# Altium PCB 幻彩灯带立创.PcbDoc
Units mm, origin at the board's own origin, x right, y up, seen from the top; angles counter-clockwise.
Board outline 96.28 x 79 mm, 2 copper layers (Top Layer, Bottom Layer); 38 components, 40 nets, 162 pads, 114 vias.
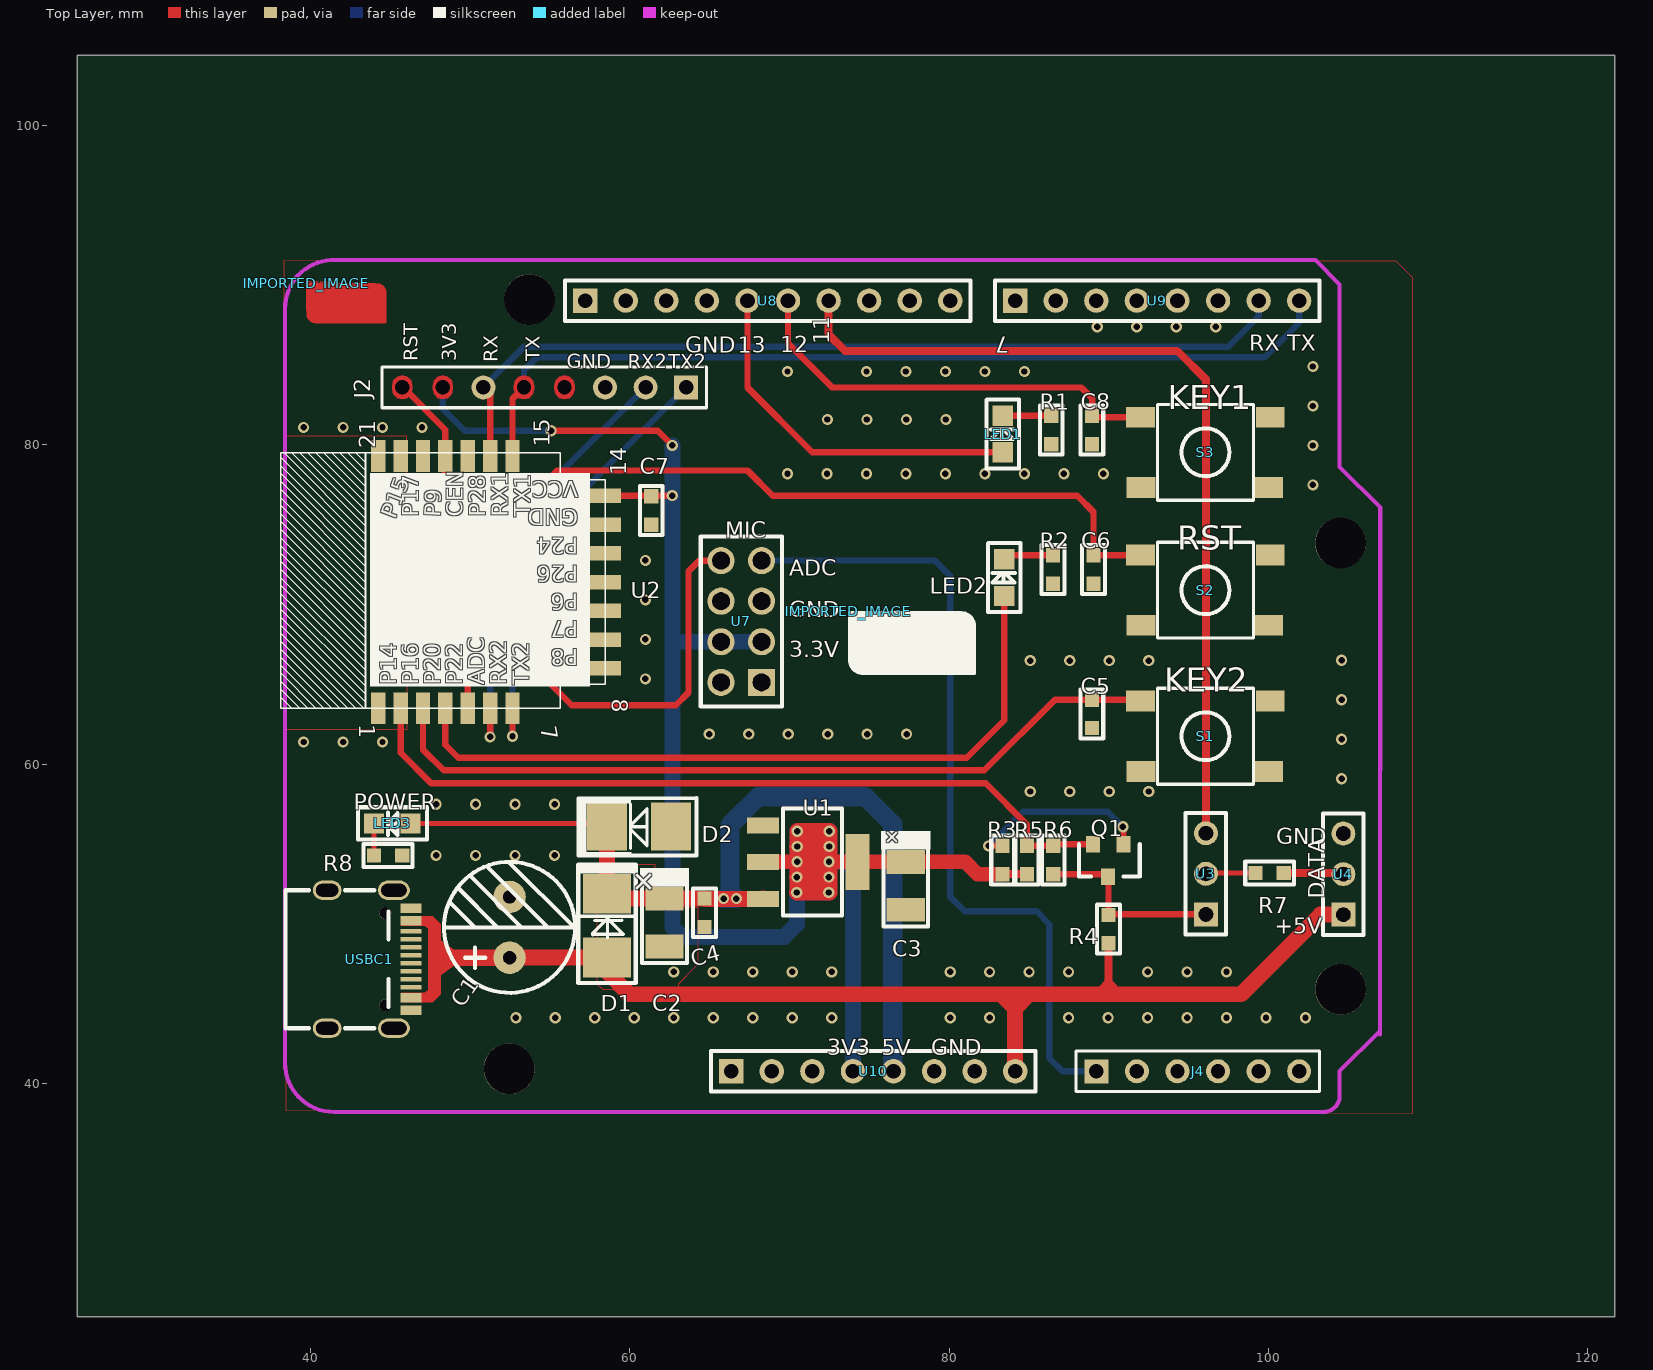
[diagram p0: Top Layer view]
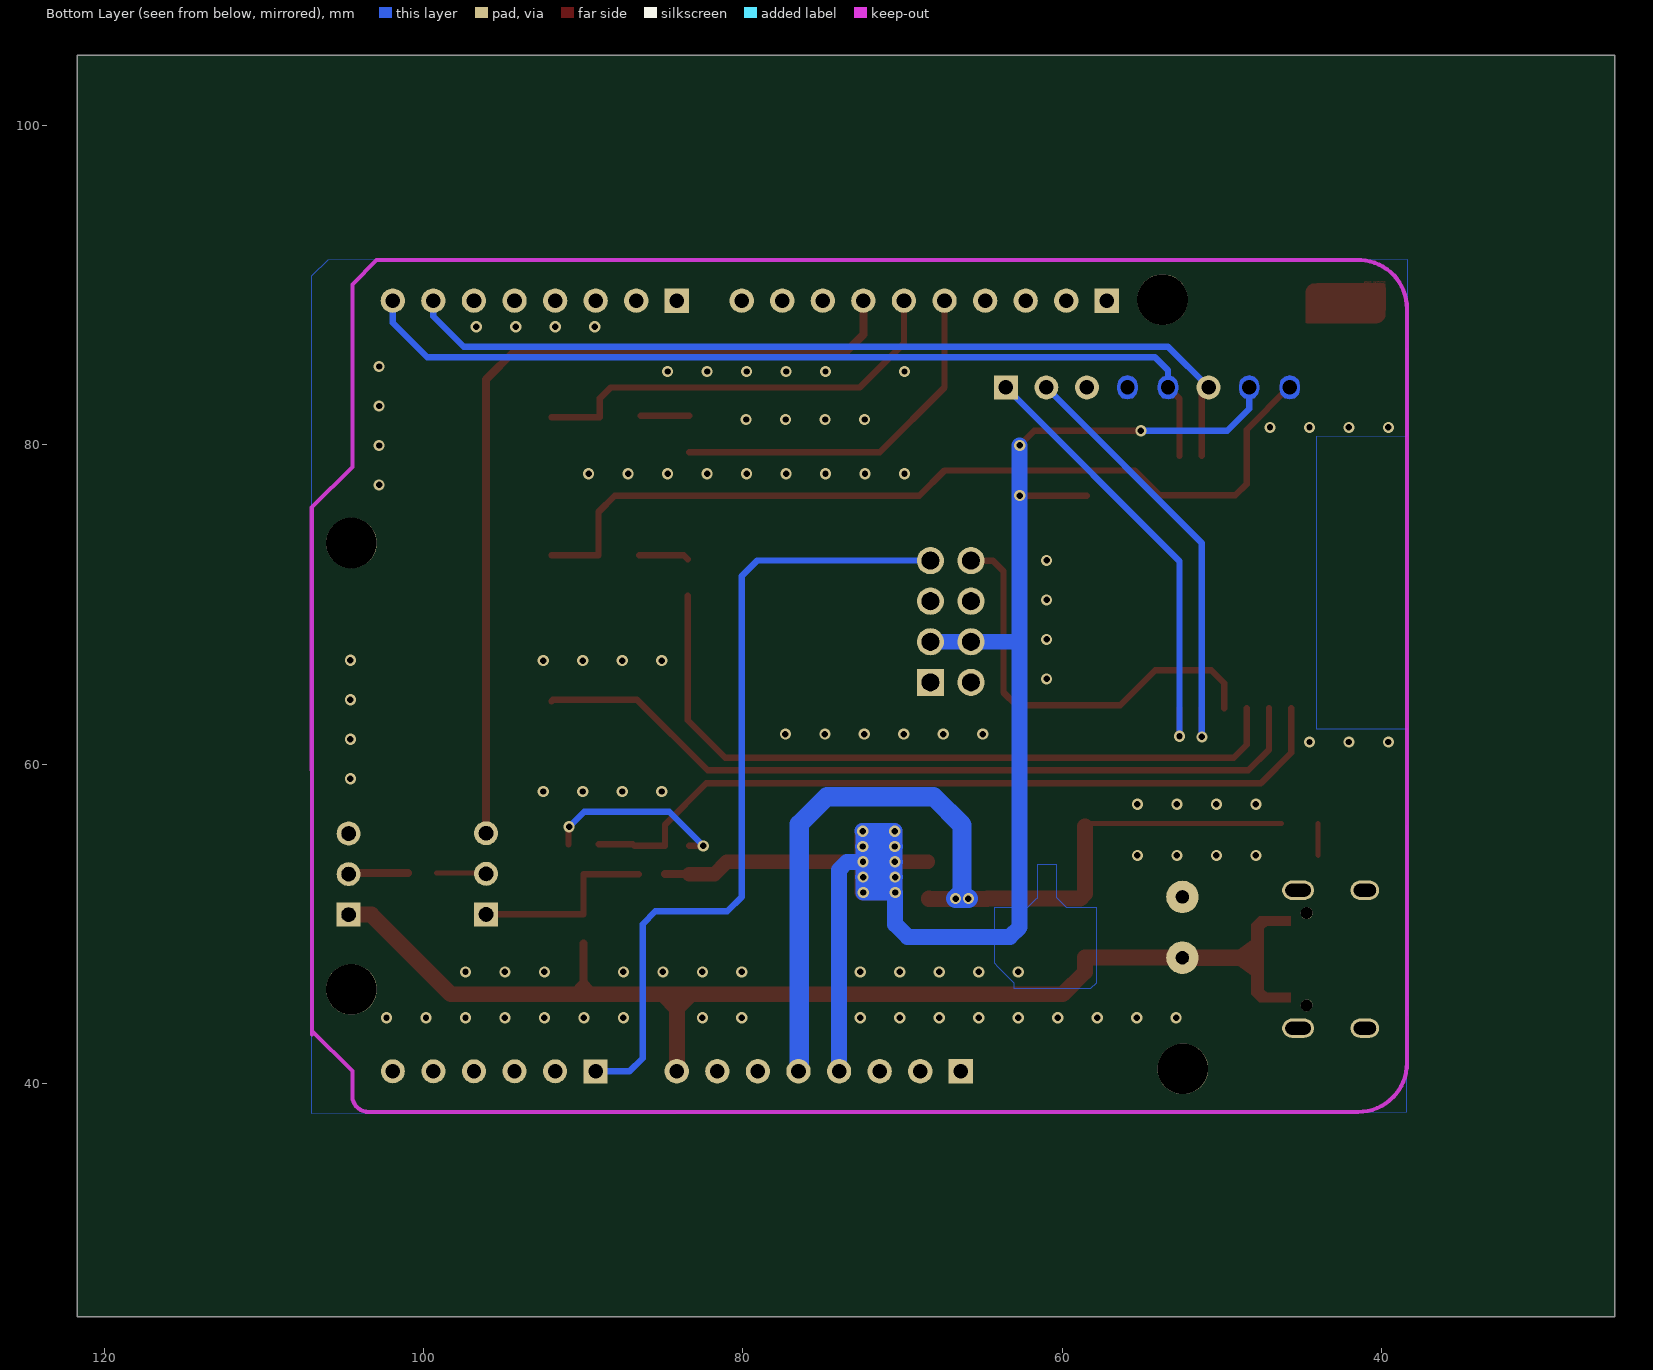
[diagram p1: Bottom Layer view, seen from below]

## Layer stack, top to bottom
Top Layer: signal copper (thickness not stored)
Dielectric: dielectric 0.32, FR-4, Dk 4.8
Bottom Layer: signal copper (thickness not stored)

## Board outline
121.682,25.4 25.4,25.4 25.4,104.397 121.682,104.397

## Components (designator, comment, footprint, x,y, rotation, side; value= is the part's Value field where it differs from the comment)
C1 "220uF±20%/16V" CD0.15 52.477,49.787 r90 top
C2 "22uF±20%/16V" _____B3528 62.177,50.087 r270 top
C3 "22uF±20%/16V" _____B3528 77.277,52.387 r270 top
C4 "0.1uF±20%/50V" C0603 64.677,51.587 r270 top
C5 "0.1uF±20%/16V" C0603 88.936,62.258 r90 top
C6 "0.1uF±20%/16V" C0603 89.038,73.079 r270 top
C7 "0.1uF±20%/16V" C0603 61.352,74.999 r90 top
C8 "0.1uF±20%/16V" C0603 88.936,80.038 r90 top
D1 "SS210" SMA(DO-214AC) 58.577,49.887 r90 top
D2 "SMBJ05CA" SMB(DO-214AA) 60.577,56.087 r180 top
IMPORTED_IMAGE "IMPORTED_IMAGE" IMPORTED_IMAGE#1 73.677,69.583 r0 top
IMPORTED_IMAGE "IMPORTED_IMAGE" IMPORTED_IMAGE#2 39.758,90.109 r0 top
J2 "CON8" HDR1X8Z 63.536,83.594 r180 top
J4 "CON6" HDR1X6Z 89.216,40.77 r0 top
LED1 "LED" LED0805_1 83.348,79.53 r90 top
LED2 "LED" LED0805_1 83.45,70.539 r90 top
LED3 "LED" LED0805_1 46.277,56.287 r180 top
Q1 "S8050" SOT-23-NPN 90.918,54.987 r180 top
R1 "1K±5%" R0603 86.396,80.038 r90 top
R2 "1K±5%" R0603 86.498,73.079 r270 top
R3 "2K±5%" R0603 83.348,53.114 r90 top
R4 "2K±5%" R0603 89.977,48.787 r90 top
R5 "2K±5%" R0603 84.872,53.114 r90 top
R6 "NC/0R" R0603 86.523,54.892 r270 top
R7 "1R±5%" R0603 99.177,53.187 r0 top
R8 "1R±5%" R0603 43.977,54.287 r0 top
S1 "KEY_SW2" KEY4-SMD 96.048,61.75 r0 top
S2 "KEY_SW2" KEY4-SMD 96.048,70.894 r0 top
S3 "KEY_SW2" KEY4-SMD 96.048,79.53 r0 top
U1 "GM1117-3.3ST3T" SOT-223 71.302,53.868 r270 top
U2 "WIFI_BLE_CBU" WIFI_BLE_CBU 58.456,71.402 r90 top
U3 "OUT_RGB_CBU" "2.54 3P" 96.076,53.137 r90 top
U4 "OUT_RGB_CBU" "2.54 3P" 104.684,53.114 r90 top
U7 "DIP-2X4P-2.54" DIP-2X4P-2.54 66.986,68.937 r90 top
U8 "2.54_1X10P" 2.54_1X10P 57.212,89.03 r0 top
U9 "2.54_1X8P" 2.54_1X8P 84.136,89.03 r0 top
U10 "2.54_1X8P" 2.54_1X8P 66.356,40.77 r0 top
USBC1 "TYPE-C-31-M-12" USB-C_SMD-TYPE-C-31-M-12 43.677,47.787 r270 top

## Footprints (in the part's own frame and the unit in brackets; to place one, negate y for a bottom-side part, rotate by r counter-clockwise, add the part's x,y. Pads: shape width x height; smd on the part's side, far side on the other; paste and mask are expansions set on the pad)
"2.54 3P" [mm]
  rect 1.5x1.5 hole 0.9 slot 0.905 at 0 deg: 1(-2.539,0)
  round 1.5 hole 0.9 slot 0.905 at 0 deg: 2(0,0) 3(2.54,0)
  silkscreen extent -3.81,-1.27 3.81,1.27
2.54_1X8P [mil]
  rect 60x60 hole 36: 1(0,0)
  round 60 hole 36: 2(100,0) 3(200,0) 4(300,0) 5(400,0) 6(500,0) 7(600,0) 8(700,0)
  silkscreen extent -50,-50 750,50
2.54_1X10P [mil]
  rect 60x60 hole 36: 1(0,0)
  round 60 hole 36: 2(100,0) 3(200,0) 4(300,0) 5(400,0) 6(500,0) 7(600,0) 8(700,0) 9(800,0) 10(900,0)
  silkscreen extent -50,-50 950,50
_____B3528 [mm]
  rect 1.5x2.4 smd: 1(-1.5,0) 2(1.5,0)
  silkscreen extent -3.4,-1.52 2.54,1.52
C0603 [mil]
  rect 35x35 smd: 1(0,0) 2(70,0)
  silkscreen extent -25,-28 95,28
CD0.15 [mil]
  round 80 hole 32 slot 32.2 at 0 deg: 1(-75,0) 2(75,0)
  silkscreen extent -161,-161 161,161
DIP-2X4P-2.54 [mm]
  rect 1.7x1.7 hole 1.1 slot 1.105 at 0 deg: 1(-3.81,-1.27)
  round 1.7 hole 1.1 slot 1.105 at 0 deg: 2(-3.81,1.27) 3(-1.27,-1.27) 4(-1.27,1.27) 5(1.27,-1.27) 6(1.27,1.27) 7(3.81,-1.27) 8(3.81,1.27)
  silkscreen extent -5.33,-2.54 5.33,2.54
HDR1X6Z [mm]
  rect 1.5x1.5 hole 0.9: 1(0,0)
  round 1.5 hole 0.9: 2(2.54,0) 3(5.08,0) 4(7.62,0) 5(10.16,0) 6(12.7,0)
  silkscreen extent -1.27,-1.27 13.97,1.27
HDR1X8Z [mm]
  rect 1.5x1.5 hole 0.9: 1(0,0)
  round 1.5 hole 0.9: 2(2.54,0) 3(5.08,0) 6(12.7,0)
  round 0 hole 0.9: 4(7.62,0) 5(10.16,0) 7(15.24,0) 8(17.78,0)
  Top Layer region: 8.255,-0.115 8.17,-0.433 7.937,-0.665 7.62,-0.75 7.302,-0.665 7.07,-0.433 6.985,-0.115 6.985,0.115 7.07,0.432 7.302,0.665 7.62,0.75 7.937,0.665 8.17,0.432 8.255,0.115
  Top Layer region: 10.795,-0.115 10.71,-0.433 10.477,-0.665 10.16,-0.75 9.842,-0.665 9.61,-0.433 9.525,-0.115 9.525,0.115 9.61,0.432 9.842,0.665 10.16,0.75 10.477,0.665 10.71,0.432 10.795,0.115
  Top Layer region: 15.875,-0.115 15.79,-0.433 15.557,-0.665 15.24,-0.75 14.922,-0.665 14.69,-0.433 14.605,-0.115 14.605,0.115 14.69,0.432 14.922,0.665 15.24,0.75 15.557,0.665 15.79,0.432 15.875,0.115
  Top Layer region: 18.415,-0.115 18.33,-0.433 18.097,-0.665 17.78,-0.75 17.462,-0.665 17.23,-0.433 17.145,-0.115 17.145,0.115 17.23,0.432 17.462,0.665 17.78,0.75 18.097,0.665 18.33,0.432 18.415,0.115
  Bottom Layer region: 8.255,-0.115 8.17,-0.433 7.937,-0.665 7.62,-0.75 7.302,-0.665 7.07,-0.433 6.985,-0.115 6.985,0.115 7.07,0.432 7.302,0.665 7.62,0.75 7.937,0.665 8.17,0.432 8.255,0.115
  Bottom Layer region: 10.795,-0.115 10.71,-0.433 10.477,-0.665 10.16,-0.75 9.842,-0.665 9.61,-0.433 9.525,-0.115 9.525,0.115 9.61,0.432 9.842,0.665 10.16,0.75 10.477,0.665 10.71,0.432 10.795,0.115
  Bottom Layer region: 15.875,-0.115 15.79,-0.433 15.557,-0.665 15.24,-0.75 14.922,-0.665 14.69,-0.433 14.605,-0.115 14.605,0.115 14.69,0.432 14.922,0.665 15.24,0.75 15.557,0.665 15.79,0.432 15.875,0.115
  Bottom Layer region: 18.415,-0.115 18.33,-0.433 18.097,-0.665 17.78,-0.75 17.462,-0.665 17.23,-0.433 17.145,-0.115 17.145,0.115 17.23,0.432 17.462,0.665 17.78,0.75 18.097,0.665 18.33,0.432 18.415,0.115
  silkscreen extent -1.27,-1.27 19.05,1.27
IMPORTED_IMAGE#1 [mm]
  silkscreen extent 0,-3.99 8,0
IMPORTED_IMAGE#2 [mm]
  Top Layer region: 166 vertices and 6 holes, not listed, extent 0,-2.494 5,0
KEY4-SMD [mm]
  rect 1.8x1.3 smd: 1(-4.035,-2.2) 2(-4.065,2.2) 3(4.065,2.2) 4(3.965,-2.2)
  silkscreen extent -3,-3 3,3
LED0805_1 [mil]
  rect 50x50 smd: 1(0,0) 2(90,0)
  silkscreen extent -40,-40 130,40
R0603 [mil]
  rect 35x35 smd: 1(0,0) 2(70,0)
  silkscreen extent -25,-28 95,28
SMA(DO-214AC) [mm]
  rect 2.5x3 smd: 1(-2,0) 2(2,0)
  silkscreen extent -3.6,-1.84 3.94,1.83
SMB(DO-214AA) [mm]
  rect 2.5x3 smd: 1(-2,0) 2(2,0)
  silkscreen extent -3.6,-1.8 3.91,1.82
SOT-23-NPN [mil]
  rect 35x40 smd: 1(75,0.01) 2(0,0.01) 3(38,80.01)
  silkscreen extent -40,0 110,80
SOT-223 [mm]
  rect 1x2 smd: 1(-2.3,-2.95) 2(0,-2.95) 3(2.3,-2.95)
  rect 3.5x1.5 smd: 2(0,2.95)
  silkscreen extent -3.35,-1.71 3.35,1.99
USB-C_SMD-TYPE-C-31-M-12 [mm]
  oval 1.2x2 hole 0.8 slot 1.6 at 90 deg: 0(-4.32,1.556) 0(4.32,1.556)
  oval 1.2x1.8 hole 0.8 slot 1.4 at 90 deg: 0(-4.32,-2.624) 0(4.32,-2.624)
  rect 0.3x1.3 smd: A1(-3.35,2.623) A4(-2.55,2.623) A5(-1.25,2.623) A6(-0.25,2.623) A7(0.25,2.623) A8(1.25,2.624) A9(2.55,2.623) A12(3.35,2.623) B1(3.05,2.623) B4(2.25,2.623) B5(1.75,2.623) B6(0.75,2.623) B7(-0.75,2.623) B8(-1.75,2.624) B9(-2.25,2.623) B12(-3.05,2.623)
  round 0.75 hole 0.75 unplated: ""(-2.89,1.026) ""(2.89,1.026)
  silkscreen extent -4.32,-5.23 4.32,1.22
WIFI_BLE_CBU [mm]
  rect 2x0.9 smd: 1(-7.9,14.2) 2(-7.9,12.8) 3(-7.9,11.4) 4(-7.9,10) 5(-7.9,8.6) 6(-7.9,7.2) 7(-7.9,5.8) 15(7.9,5.8) 16(7.9,7.2) 17(7.9,8.6) 18(7.9,10) 19(7.9,11.4) 20(7.9,12.8) 21(7.9,14.2)
  rect 0.9x2 smd: 8(-5.4,0) 9(-3.6,0) 10(-1.8,0) 11(0,0) 12(1.8,0) 13(3.6,0) 14(5.4,0)
  silkscreen extent -7.9,0 8.14,20.33

## Free pads (board coordinates)
  round 3.175 hole 3.175 unplated: ""(52.447,40.927) ""(53.717,89.087) ""(104.517,45.907) ""(104.517,73.847)

## Via types
v1: diameter 0.7, hole 0.4, Top Layer to Bottom Layer, 114 vias

## Nets (pads, with @x,y where several pads share a name; then routed paths per layer and width w, separated by ;. In a path a pad name is that pad's centre, name@x,y a point inside that pad or via, vN(x,y) a via of type N, cw(c..) or ccw(c..) an arc to the next point about the centre after c; other vN are vias at no path point)
+3.3V: C3.1 C7.2 J2.7 R3.1 R5.1 U1.2 U2.14 U7.3 U7.4 | length 138.8
  Top Layer w0.4: v1(55.078,80.876) 61.752,80.876 v1(62.666,79.963) ; U2.14 v1@62.666,76.802 ; U1.2@68.404,53.898 U1.2@68.394,53.887 ; 71.171,53.887 71.19,53.868 U1.2@74.252,53.868 ; v1@72.496,53.868 72.445,53.868 72.425,53.887 70.494,53.887 70.477,53.887 U1.2@68.394,53.887 ; U1.2@68.394,53.887 68.363,53.856 68.352,53.868 68.371,53.887 U1.2@68.394,53.887
  Top Layer w0.5: R3.1 R5.1
  Top Layer w0.9: U1.2@68.404,53.898 v1@70.494,53.898 ; v1(72.479,53.887) 81,53.887 81.774,53.114 R3.1
  Top Layer w1: v1(70.46,51.968) v1@70.494,51.968 ; v1(70.468,52.928) v1@70.494,52.928 ; v1@70.477,53.887 v1@72.453,53.887 ; v1(70.485,54.847) v1@70.494,54.847 ; v1@72.425,53.887 v1@72.479,53.887 ; v1(72.462,51.968) v1@70.494,51.968 ; v1(72.47,52.928) v1@70.494,52.928 ; v1(72.487,54.847) v1@70.494,54.847 ; v1@72.496,51.968 72.496,53.868 72.496,53.898 v1(72.496,55.807) v1(70.494,55.807) v1@70.494,54.847 ; v1@70.494,51.968 v1@70.494,52.928 ; v1@70.494,52.928 70.494,53.887 70.494,53.898 v1@70.494,54.847
  Bottom Layer w0.4: J2.7 48.296,82.248 49.668,80.876 v1(55.078,80.876)
  Bottom Layer w1: 62.665,67.677 U7.3 ; v1(62.666,79.963) v1(62.666,76.817) 62.665,49.799 63.277,49.187 69.678,49.187 70.46,49.97 v1(70.46,51.968) ; v1(70.46,51.968) v1(72.462,51.968) v1@72.462,55.773 ; v1(70.468,52.928) v1(72.47,52.928) ; v1@70.477,53.887 v1@72.479,53.887 ; v1(70.485,54.847) v1(72.487,54.847) ; v1@70.494,52.002 v1(70.494,55.807) v1(72.496,55.807) ; v1(72.479,53.887) 73.478,53.887 73.976,53.389 73.976,40.77
  other v1: 70.477,53.887
+3V3: U10.4
+5V: C1.1 D1.1 R4.1 U4.1 USBC1.A4 USBC1.A9 USBC1.B4 USBC1.B9 | length 83.7
  Top Layer w0.254: USBC1.A9 47.227,45.237 47.578,45.588 47.578,49.987 47.227,50.337 USBC1.A4
  Top Layer w0.5: 89.521,45.875 89.952,46.307 ; 89.8,45.596 89.952,45.748 89.952,46.307 ; R4.1 89.977,46.383 89.952,46.358 ; 90.714,45.596 89.952,46.358 ; 89.952,46.307 89.952,46.358
  Top Layer w1: C1.1@52.487,47.882 47.877,47.887 D1.1 58.577,46.987 59.968,45.596 83.272,45.596 84.136,44.732 ; 83.177,45.587 89.8,45.596 90.714,45.596 98.284,45.596 103.262,50.574 U4.1@104.684,50.574 ; 84.136,40.77 84.136,44.732 ; 84.999,45.596 84.136,44.732
+5VF: C2.1 C4.1 D1.2 D2.2 LED3.1 U1.3 U10.5 | length 59.2
  Top Layer w0.3: LED3.1 58.377,56.287 D2.2
  Top Layer w1: D2.2 D1.2 58.877,51.587 C4.1 64.696,51.568 U1.3 ; U1.3 U1.3@68.353,51.587
  Bottom Layer w1.2: v1@65.876,51.587 66.676,51.588 66.277,51.988 66.277,56.188 68.055,57.966 74.738,57.966 76.465,56.238 76.465,40.821 U10.5
  other v1: 65.877,51.587 66.677,51.587
ADC: U2.5 U7.8 | length 26.9
  Top Layer w0.4: U2.5@49.856,63.502 49.856,65.067 50.676,65.887 54.177,65.887 56.376,63.687 62.879,63.687 63.676,64.487 63.676,72.088 64.336,72.747 U7.8
GND: C1.2 C2.2 C3.2 C4.2 C5.1 C6.2 C7.1 C8.1 D2.1 J2.3 J2.4 R1.1 R2.2 R8.2 S1.1 S2.1 S3.1 U1.1 U2.13 U4.3 U7.5 U7.6 U8.4 U10.6 U10.7 USBC1.0 USBC1.A1 USBC1.A12 USBC1.B1 USBC1.B12
  other v1: 52.868,44.123 55.341,44.123 57.813,44.123 60.285,44.123 62.757,44.123 65.23,44.123 67.702,44.123 70.174,44.123 72.647,44.123 80.063,44.123 82.536,44.123 87.48,44.123 89.952,44.123 92.425,44.123 94.897,44.123 97.369,44.123 99.841,44.123 102.314,44.123 62.757,46.993 65.23,46.993 67.702,46.993 70.174,46.993 72.647,46.993 80.063,46.993 82.536,46.993 85.008,46.993 87.48,46.993 92.425,46.993 94.897,46.993 94.897,46.993 97.369,46.993 47.877,54.287 50.349,54.287 52.821,54.287 55.294,54.287 47.877,57.487 50.349,57.487 52.821,57.487 55.294,57.487 85.077,58.287 87.549,58.287 90.022,58.287 92.494,58.287 104.577,59.087 39.577,61.387 42.049,61.387 44.521,61.387 104.577,61.56 64.977,61.887 67.449,61.887 69.921,61.887 72.394,61.887 74.866,61.887 77.338,61.887 104.577,64.032 60.977,65.343 85.077,66.487 87.549,66.487 90.022,66.487 92.494,66.487 104.577,66.504 60.977,67.815 60.977,70.287 60.977,72.76 102.777,77.487 69.877,78.187 72.349,78.187 74.821,78.187 77.294,78.187 79.766,78.187 82.238,78.187 84.711,78.187 87.183,78.187 89.655,78.187 102.777,79.96 39.577,81.087 42.049,81.087 44.521,81.087 46.994,81.087 72.377,81.587 74.849,81.587 77.321,81.587 79.794,81.587 102.777,82.432 69.877,84.587 74.821,84.587 77.294,84.587 79.766,84.587 82.238,84.587 84.71,84.587 102.777,84.904 89.277,87.387 91.749,87.387 94.221,87.387 96.694,87.387
MIC: J4.1 U7.7 | length 50.9
  Bottom Layer w0.4: U7.7 79.107,72.757 80.077,71.787 80.077,51.687 80.979,50.787 85.477,50.787 86.277,49.987 86.277,41.587 87.095,40.77 J4.1
NETC8_2: C8.2 S3.2 U8.6 | length 27.4
  Top Layer w0.4: U8.6 69.912,86.352 72.678,83.587 88.276,83.587 88.949,82.915 88.949,81.73 S3.2
NETJ1_5: LED1.1 U8.5 | length 23.1
  Top Layer w0.4: U8.5 67.372,83.593 71.433,79.53 LED1.1
NETJ7_2: R7.2 U4.2 | length 3.8
  Top Layer w0.5: R7.2 104.611,53.187 U4.2
NETLED1_2: LED1.2 R1.2 | length 3
  Top Layer w0.4: LED1.2 R1.2
NETLED2_2: LED2.2 R2.1 | length 3.2
  Top Layer w0.4: LED2.2 83.704,73.079 R2.1
NETLED3_2: LED3.2 R8.1 | length 2
  Top Layer w0.3: R8.1 43.991,54.301 LED3.2
NETQ1_2: Q1.2 R3.2 | length 11.7
  Top Layer w0.4: v1(82.477,54.887) 83.344,54.887 R3.2 ; v1(90.877,56.087) 90.918,56.046 Q1.2
  Bottom Layer w0.4: v1(82.477,54.887) 84.615,57.026 89.938,57.026 v1(90.877,56.087)
OUT_DATA: Q1.1 R5.2 R6.1 U2.2 | length 49.4
  Top Layer w0.4: U2.2 45.657,60.708 47.56,58.804 82.282,58.804 84.872,56.213 R5.2 86.783,54.892 86.884,54.994 Q1.1@89.013,54.987
OUT_RGB: R7.1 U3.2 | length 3.2
  Top Layer w0.3: U3.2@96.048,53.114 96.122,53.187 R7.1
OUT_RGB_ARD: U3.3 U8.7 | length 55.3
  Top Layer w0.5: U8.7 72.452,86.913 73.478,85.887 94.278,85.887 96.076,84.088 U3.3
OUT_RGB_CBU: Q1.3 R4.2 R6.2 U3.1 | length 12.1
  Top Layer w0.4: R6.2 89.978,53.114 89.978,50.597 U3.1@96.076,50.597
P6: U2.10
P6_KEY1: C5.2 S1.2 U2.3 | length 49.9
  Top Layer w0.4: U2.3 47.057,60.908 48.347,59.617 82.205,59.617 86.625,64.036 91.898,64.036 S1.2
P7: U2.9
P8: U2.8
P9: U2.19
P14: U2.1
P15: U2.21
P17: U2.20
P22: LED2.1 U2.4 | length 46.4
  Top Layer w0.4: U2.4 48.456,61.208 49.259,60.404 81.093,60.404 83.45,62.76 LED2.1
P24: U2.12
P26: U2.11
P28: U2.17
RST: C6.1 J2.8 S2.2 U2.18 | length 55.5
  Top Layer w0.4: J2.8 45.807,83.594 48.456,80.945 48.456,77.541 49.16,76.838 53.91,76.838 55.459,78.387 67.377,78.387 68.952,76.812 88.022,76.812 89.038,75.796 C6.1 S2.2
RX2: J2.2 U2.6 | length 27.7
  Top Layer w0.4: v1(51.257,61.711) U2.6
  Bottom Layer w0.4: v1@51.256,61.711 51.256,73.854 J2.2
S$975: 
S$977: 
S$979: 
S$983: 
S$992: 
TX2: J2.1 U2.7 | length 28.1
  Top Layer w0.4: v1(52.656,61.75) U2.7
  Bottom Layer w0.4: v1(52.656,61.75) 52.658,72.714 J2.1
WRX: J2.6 U2.16 | length 55.8
  Top Layer w0.4: J2.6 51.256,83.174 U2.16
  Bottom Layer w0.4: J2.6 53.376,86.134 97.471,86.134 99.376,88.039 99.376,89.03
WTX: J2.5 U2.15 | length 56.8
  Top Layer w0.4: U2.15 52.656,82.874 J2.5
  Bottom Layer w0.4: J2.5 53.376,84.668 54.189,85.48 99.763,85.48 101.916,87.633 101.916,89.03
pads on no net: J4.2 J4.3 J4.4 J4.5 J4.6 S1.3 S1.4 S2.3 S2.4 S3.3 S3.4 U7.1 U7.2 U8.1 U8.2 U8.3 U8.8 U8.9 U8.10 U9.1 U9.2 U9.3 U9.4 U9.5 U9.6 U9.7 U9.8 U10.1 U10.2 U10.3 U10.8 USBC1. USBC1.A5 USBC1.A6 USBC1.A7 USBC1.A8 USBC1.B5 USBC1.B6 USBC1.B7 USBC1.B8

## Polygon pours and split planes (outlines as drawn)
GND on Top Layer (solid): 38.477,38.287 38.377,62.187 46.077,62.187 46.038,80.545 38.438,80.545 38.377,91.587 46.041,91.527 107.957,91.527 108.957,90.527 108.982,90.502 108.982,38.111
+3.3V on Top Layer (solid): 60.438,53.698 60.438,51.641 60.006,51.209 59.803,51.006 57.948,51.006 57.948,46.256 58.304,45.901 63.054,45.901 63.054,46.256 64.07,47.272 64.298,47.501 64.298,51.006 62.216,51.006 61.708,51.514 61.606,51.616 61.606,53.698
GND on Bottom Layer (solid): 38.416,38.23 38.377,62.187 44.076,62.177 44.076,80.537 38.406,80.557 38.377,91.587 105.996,91.57 106.996,90.57 107.021,90.544 107.021,38.154
+3.3V on Bottom Layer (solid): 60.374,53.724 60.374,51.666 59.942,51.235 59.739,51.031 57.885,51.031 57.885,46.282 58.241,45.926 62.99,45.926 62.99,46.282 64.006,47.298 64.235,47.526 64.235,51.031 62.152,51.031 61.644,51.539 61.543,51.641 61.543,53.724

## Keep-outs
Keep-Out Layer:
  lines w0.254 net S$975: 38.416,41.287 ccw(c41.469,41.28) 41.466,38.227
  lines w0.254 net S$977: 103.426,38.227 ccw(c103.445,39.238) 104.456,39.208
  lines w0.254 net S$992: 38.416,88.527 cw(c41.447,88.538) 41.584,91.567

## Other copper
Top Layer:
  region net +5V: 45.677,45.087 45.677,45.687 47.177,45.687 47.377,45.887 47.377,49.687 47.177,49.887 45.677,49.887 45.677,50.487 47.677,50.487 48.177,49.987 48.177,48.987 48.977,48.387 52.377,48.387 52.377,47.387 48.977,47.387 48.177,46.787 48.177,45.587 47.677,45.087 45.677,45.087

## Silkscreen, mask and mechanical layers (free items; w line width, h text height)
Top Overlay:
  region: 43.75,78.209 43.75,64.874 57.502,64.874 57.502,78.209
  text "7" at 83.755,86.761 h1 r180
  text "11" at 72.477,86.287 h1 r90
  text "RX" at 98.777,85.887 h1
  text "TX" at 101.177,85.887 h1
  text "12" at 69.437,85.787 h1
  text "GND" at 63.477,85.761 h1
  text "13" at 66.777,85.761 h1
  text "3V3" at 49.147,85.245 h0.89 r90
  text "RST" at 46.734,85.22 h0.89 r90
  text "TX" at 54.38,85.22 h0.89 r90
  text "RX" at 51.738,85.169 h0.89 r90
  text "GND" at 56.069,84.801 h0.89
  text "RX2" at 59.879,84.801 h0.89
  text "TX2" at 62.419,84.801 h0.89
  text "KEY1" at 93.677,82.237 h1.5
  text "MIC" at 65.977,74.187 h1
  text "RST" at 94.277,73.437 h1.5
  text "ADC" at 69.977,71.787 h1
  text "GND" at 69.977,69.187 h1
  text "3.3V" at 69.977,66.687 h1
  text "KEY2" at 93.477,64.538 h1.5
  text "POWER" at 42.708,57.141 h1
  text "GND" at 100.477,54.987 h1
  text "DATA" at 103.477,51.587 h1 r90
  text "+5V" at 100.377,49.387 h1
  text "3V3" at 72.377,41.779 h1.02
  text "5V" at 75.777,41.779 h1.02
  text "GND" at 78.877,41.779 h1.02
Document:
  lines w0.254: 38.416,88.522 cw(c41.464,88.522) 41.464,91.57 102.932,91.57 104.456,90.046 104.456,78.616 106.996,76.076 106.996,43.31 104.456,40.77 104.456,39.23 cw(c103.456,39.23) 103.456,38.23 41.466,38.227 ; 38.416,88.537 38.416,41.278 ccw(c41.464,41.278) 41.464,38.23 ; 53.986,40.766 cw(c52.386,40.77) 53.986,40.77 ; 55.256,89.026 cw(c53.656,89.03) 55.256,89.03 ; 106.056,45.846 cw(c104.456,45.85) 106.056,45.85 ; 106.056,73.786 cw(c104.456,73.79) 106.056,73.79

## Text inside footprints (layer, text, board x,y; h text height)
C2: Top Overlay "+" at 61.047,53.718 h1.5 r225
C3: Top Overlay "+" at 76.523,56.141 h1 r225
U2: Top Overlay "P15" at 45.311,75.308 h1 r69; Top Overlay "P17" at 46.763,75.487 h1 r90; Top Overlay "P9" at 48.149,75.461 h1 r87; Top Overlay "CEN" at 49.553,75.487 h1 r90; Top Overlay "P28" at 50.955,75.487 h1 r90; Top Overlay "RX1" at 52.374,75.487 h1 r90; Top Overlay "TX1" at 53.777,75.487 h1 r90; Top Overlay "GND" at 56.777,75.957 h1 r180; Top Overlay "VCC" at 56.775,77.709 h1 r180; Top Overlay "TX2" at 53.676,64.97 h1 r90; Top Overlay "RX2" at 52.277,64.97 h1 r90; Top Overlay "ADC" at 50.895,64.97 h1 r90; Top Overlay "P22" at 49.513,64.97 h1 r90; Top Overlay "P20" at 48.13,64.97 h1 r90; Top Overlay "P16" at 46.764,64.97 h1 r90; Top Overlay "P14" at 45.366,64.97 h1 r90; Top Overlay "21" at 44.077,79.787 h1 r90; Top Overlay "1" at 43.077,62.487 h1 r270; Top Overlay "P24" at 56.777,74.188 h1 r180; Top Overlay "P26" at 56.777,72.436 h1 r180; Top Overlay "P6" at 56.777,70.687 h1 r180; Top Overlay "P7" at 56.777,68.946 h1 r180; Top Overlay "P8" at 56.777,67.194 h1 r180; Top Overlay "7" at 54.386,62.292 h1 r281; Top Overlay "8" at 58.877,64.087 h1 r270; Top Overlay "14" at 59.777,78.087 h1 r90; Top Overlay "15" at 54.977,79.887 h1 r90